# EAGLE board RoomMonitor (EAGLE 8.4.2)
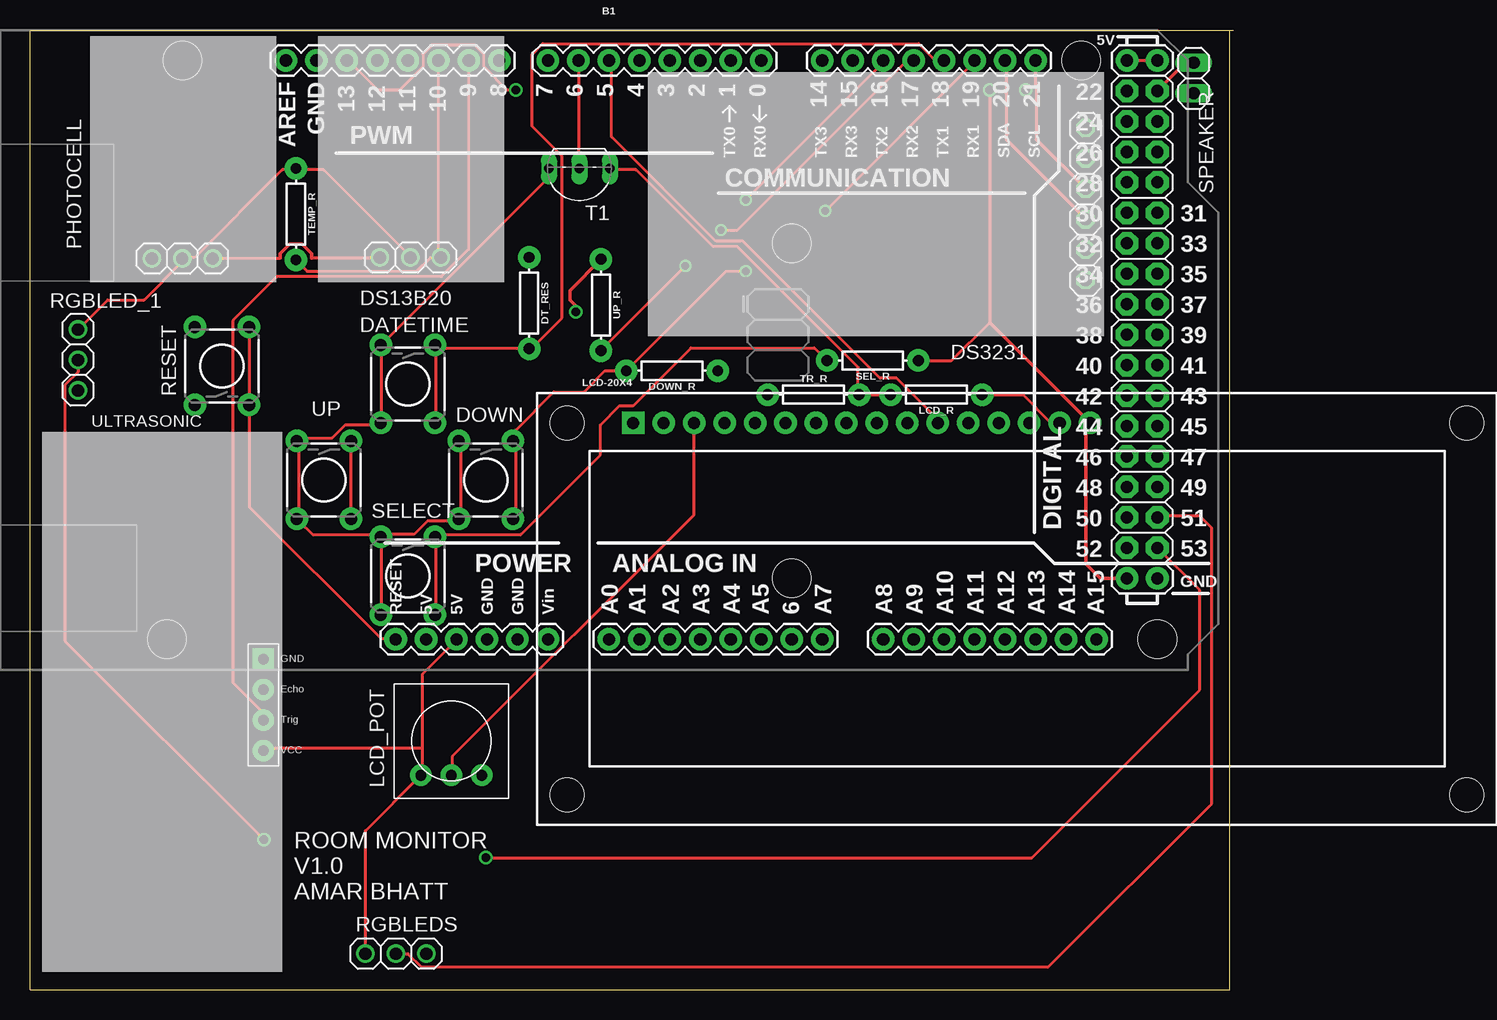
[diagram p0: board, top side]
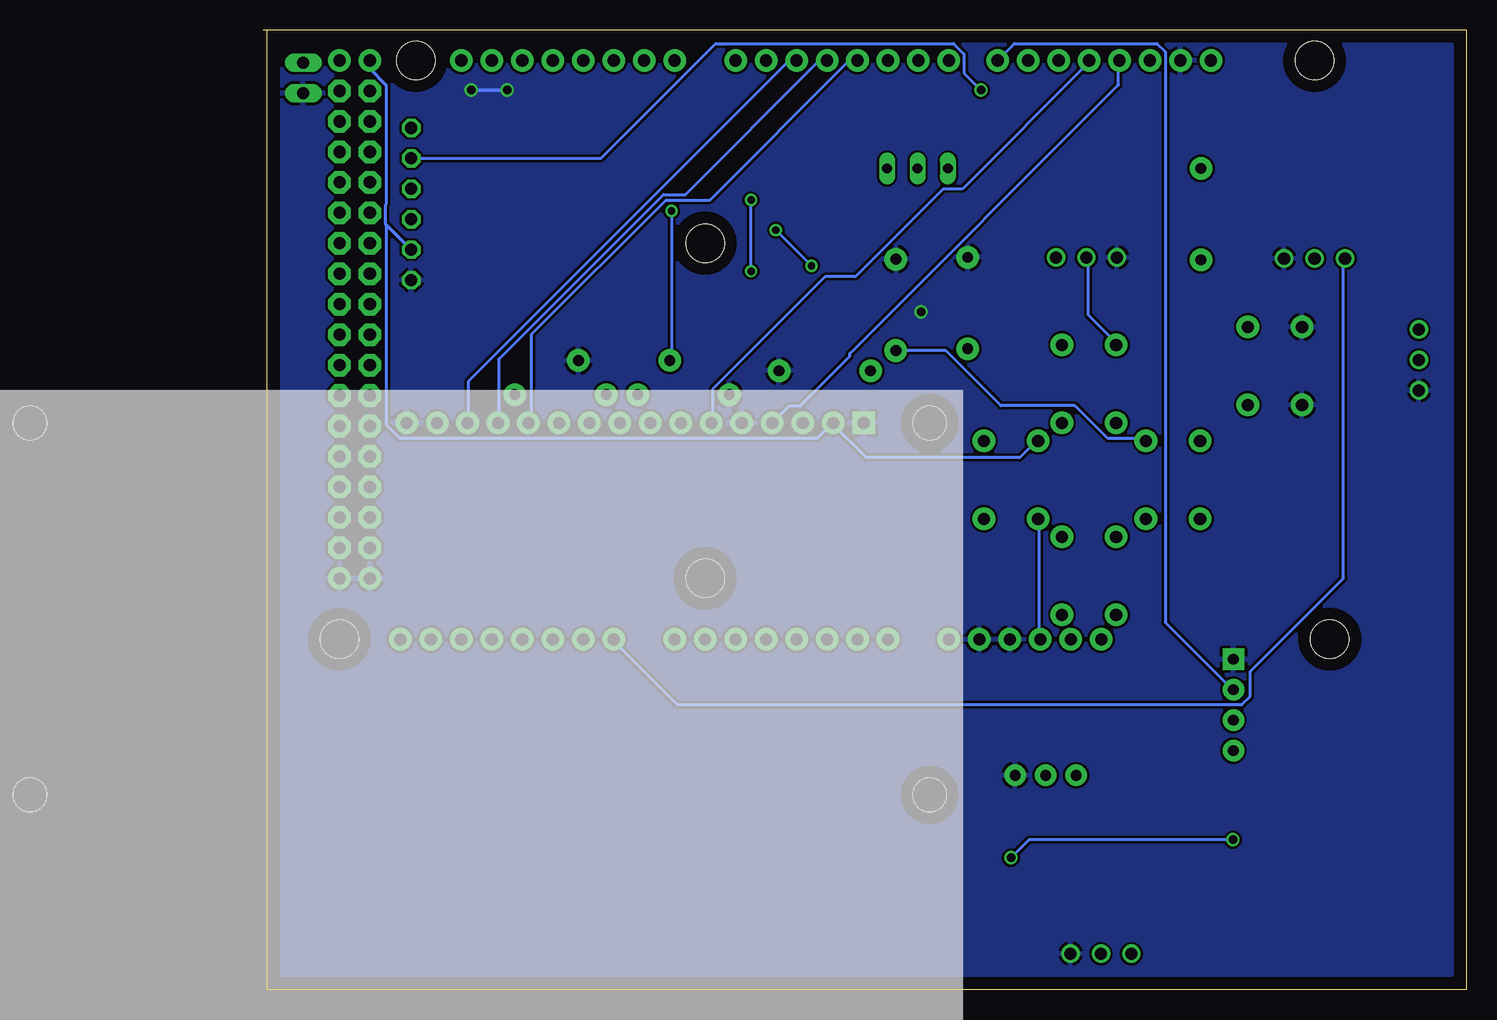
[diagram p1: board, bottom side, seen from below]

Size 100.33 x 80.01 mm. Coordinates in mm from the lower left corner, seen from the top.
Outline: 100,80 100,0 0,0 0,80.01 100.33,80.01
Copper layers (1*16): Top 0.035mm / dielectric 1.5mm / Bottom 0.035mm
Design rules "default": minimum track width 10mil, minimum drill 24mil, track to track 8mil, track to pad 8mil, pad to pad 8mil, via to via 8mil, smd to smd 8mil, copper to edge 40mil, drill to drill 8mil, minimum pad ring 10mil, minimum via ring 8mil, stop-mask expansion 4mil, vias tented up to drill 0mil, thermal gap 10mil

## Footprints (pad centres in the part's own frame; a part is rotated, then mirrored left to right if it is on the bottom)
ARDUINO_MEGA = drill 1.016 pad 1.88: 0 13.97,24.13; 1 11.43,24.13; 2 8.89,24.13; 3 6.35,24.13; 3.3V -13.97,-24.13; 4 3.81,24.13; 5 1.27,24.13; 5V@0 -11.43,-24.13; 5V@1 44.45,24.13; 5V@2 46.99,24.13; 6 -1.27,24.13; 7 -3.81,24.13; 8 -7.874,24.13; 9 -10.414,24.13; 10 -12.954,24.13; 11 -15.494,24.13; 12 -18.034,24.13; 13 -20.574,24.13; 14 19.05,24.13; 15 21.59,24.13; 16 24.13,24.13; 17 26.67,24.13; 18 29.21,24.13; 19 31.75,24.13; 20 34.29,24.13; 21 36.83,24.13; A0 1.27,-24.13; A1 3.81,-24.13; A2 6.35,-24.13; A3 8.89,-24.13; A4 11.43,-24.13; A5 13.97,-24.13; A6 16.51,-24.13; A7 19.05,-24.13; A8 24.13,-24.13; A9 26.67,-24.13; A10 29.21,-24.13; A11 31.75,-24.13; A12 34.29,-24.13; A13 36.83,-24.13; A14 39.37,-24.13; A15 41.91,-24.13; AREF -25.654,24.13; GND@0 -8.89,-24.13; GND@1 -6.35,-24.13; GND@2 44.45,-19.05; GND@3 46.99,-19.05; GND@4 -23.114,24.13; RESET -16.51,-24.13; VIN -3.81,-24.13 | drill 1.016 pad 1.88 octagon: 22 44.45,21.59; 23 46.99,21.59; 24 44.45,19.05; 25 46.99,19.05; 26 44.45,16.51; 27 46.99,16.51; 28 44.45,13.97; 29 46.99,13.97; 30 44.45,11.43; 31 46.99,11.43; 32 44.45,8.89; 33 46.99,8.89; 34 44.45,6.35; 35 46.99,6.35; 36 44.45,3.81; 37 46.99,3.81; 38 44.45,1.27; 39 46.99,1.27; 40 44.45,-1.27; 41 46.99,-1.27; 42 44.45,-3.81; 43 46.99,-3.81; 44 44.45,-6.35; 45 46.99,-6.35; 46 44.45,-8.89; 47 46.99,-8.89; 48 44.45,-11.43; 49 46.99,-11.43; 50 44.45,-13.97; 51 46.99,-13.97; 52 44.45,-16.51; 53 46.99,-16.51 | hole 3.2: -34.29,24.13; -35.56,-24.13; 16.51,8.89; 16.51,-19.05; 40.64,24.13; 46.99,-24.13
TACTILE-PTH = drill 1.016 pad 1.88: 1 -3.251,2.261; 2 3.251,2.261; 3 -3.251,-2.261; 4 3.251,-2.261
AXIAL-0.3 = drill 0.9 pad 1.88: P$1 -3.81,0; P$2 3.81,0
1X03 = drill 1.016: 1 -2.54,0; 2 0,0; 3 2.54,0
1X06 = drill 1.016 octagon: 1 -6.35,0; 2 -3.81,0; 3 -1.27,0; 4 1.27,0; 5 3.81,0; 6 6.35,0
LCD-16X2 = drill 1.016 pad 1.88 square: 1 -32,15.5 | drill 1.016 pad 1.88: 2 -29.46,15.5; 3 -26.92,15.5; 4 -24.38,15.5; 5 -21.84,15.5; 6 -19.3,15.5; 7 -16.76,15.5; 8 -14.22,15.5; 9 -11.68,15.5; 10 -9.14,15.5; 11 -6.6,15.5; 12 -4.06,15.5; 13 -1.52,15.5; 14 1.02,15.5; 15 3.56,15.5; 16 6.1,15.5 | hole 2.8: -37.5,15.5; -37.5,-15.5; 37.5,15.5; 37.5,-15.5
TRIM-3386 = drill 0.9 pad 1.778: 1 -2.54,-2.857; 2 0,-2.857; 3 2.54,-2.857
1X02 = drill 1.016 long: 1 -1.27,0; 2 1.27,0
TO92-EBC-OVAL = drill 0.813 long: B 0,-1.27; C 2.54,-1.27; E -2.54,-1.27
HC-SR04_FOOTPRINT = drill 0.9 pad 1.778: ECHO 0,1.27; TRIG 0,-1.27; VCC 0,-3.81 | drill 0.9 pad 1.778 square: GND 0,3.81

## Placement (x,y rotation side)
B1  ARDUINO_MEGA_R3FULL  [ARDUINO_MEGA]  46.99,53.34 0 top
DATETIME  [TACTILE-PTH]  31.5,50.5 270 top
DOWN  [TACTILE-PTH]  38,42.5 270 top
DOWN_R  10K  [AXIAL-0.3]  53.52,51.6 180 top
DS13B20  [1X03]  31.71,61.04 0 top
DS3231  [1X06]  88,65.5 90 top
DT_RES  10K  [AXIAL-0.3]  41.61,57.25 270 top
LCD-20X4  LCD-16X2SILK  [LCD-16X2]  82.28,31.75 0 top
LCD_POT  [TRIM-3386]  35.12,20.73 0 top
LCD_R  220  [AXIAL-0.3]  75.55,49.61 180 top
PHOTOCELL  [1X03]  12.7,60.96 180 top
RESET  [TACTILE-PTH]  16,52 90 top
RGBLED_1  [1X03]  4,52.5 270 top
RGBLEDS  [1X03]  30.5,3 0 top
SEL_R  10K  [AXIAL-0.3]  70.25,52.45 180 top
SELECT  [TACTILE-PTH]  31.5,34.5 270 top
SPEAKER  [1X02]  97,76 90 top
T1  2N2222  [TO92-EBC-OVAL]  45.8,67.19 180 top
TEMP_R  1M  [AXIAL-0.3]  22.17,64.65 270 top
TR_R  1M  [AXIAL-0.3]  65.3,49.61 0 top
ULTRASONIC  HC-SR04  [HC-SR04_FOOTPRINT]  19.46,23.74 0 top
UP  [TACTILE-PTH]  24.5,42.5 270 top
UP_R  10K  [AXIAL-0.3]  47.6,57.09 270 top

## Library data of the parts
B1 = SparkFun-Boards
DATETIME DOWN RESET SELECT = SparkFun-Retired
DOWN_R DT_RES LCD_R SEL_R TEMP_R TR_R UP_R = SparkFun-Resistors; PROD_ID: RES-09329
DS13B20 DS3231 LCD_POT PHOTOCELL RGBLED_1 RGBLEDS T1 = adafruit
LCD-20X4 = SparkFun-Displays; SF_ID: LCD-00255
SPEAKER = pinhead
ULTRASONIC = hc-sr04
UP = SparkFun-Retired; SPICEPREFIX: E

## Nets
5V: B1.5V@0 B1.5V@1 B1.5V@2 DATETIME.3 DATETIME.4 DOWN.3 DOWN.4 DS13B20.2 DS3231.2 LCD-20X4.2 LCD_POT.1 PHOTOCELL.2 RGBLED_1.1 RGBLEDS.1 SELECT.3 SELECT.4 T1.C TEMP_R.P$1 ULTRASONIC.VCC UP.3 UP.4
CLK_DS: B1.13 DS3231.5
CLK_SCL: B1.21 DS3231.4
CLK_SDA: B1.20 DS3231.3
DOWN_BUT: B1.16 DOWN.1 DOWN.2 DOWN_R.P$2
DS13B20: B1.10 DS13B20.3 TEMP_R.P$2
DT_BUT: B1.18 DATETIME.1 DATETIME.2 DT_RES.P$2
GND: B1.GND@0 B1.GND@1 B1.GND@2 B1.GND@3 B1.GND@4 DOWN_R.P$1 DS13B20.1 DS3231.1 DT_RES.P$1 LCD-20X4.1 LCD-20X4.5 LCD-20X4.16 LCD_POT.3 PHOTOCELL.1 RESET.1 RESET.2 RGBLED_1.3 RGBLEDS.3 SEL_R.P$1 SPEAKER.1 TR_R.P$1 ULTRASONIC.GND UP_R.P$1
LCD_E: B1.11 LCD-20X4.6
N$1: B1.53 RGBLED_1.2
N$2: B1.5 LCD-20X4.11
N$3: B1.4 LCD-20X4.12
N$4: B1.51 RGBLEDS.2
N$6: B1.3 LCD-20X4.13
N$7: B1.2 LCD-20X4.14
N$9: LCD_R.P$2 T1.E TR_R.P$2
N$11: LCD-20X4.15 LCD_R.P$1
N$22: B1.12 LCD-20X4.4
PHOTOCELL: B1.A8 PHOTOCELL.3
POT: LCD-20X4.3 LCD_POT.2
RESET: B1.RESET RESET.3 RESET.4
SEL_BUT: B1.19 SEL_R.P$2 SELECT.1 SELECT.2
SPEAKER: B1.23 SPEAKER.2
TR_SW: B1.6 T1.B
UP_BUT: B1.17 UP.1 UP.2 UP_R.P$2
US_ECHO: B1.8 ULTRASONIC.ECHO
US_TRIG: B1.9 ULTRASONIC.TRIG

## Tracks (layer width: path | path; a pad name or v marks a point on that pad's centre or on a via)
5V
  Top 0.254: SELECT.4 29.26,31.32 29.26,37.72 SELECT.3 | 29.26,53.72 43.2,67.67 43.2,68.35 T1.C | 29.26,53.72 29.26,47.32 DATETIME.4 29.03,47.09 26.29,47.09 25.15,45.95 22.4,45.95 UP.3 22.4,45.72 22.4,39.32 UP.4 22.4,39.09 23.55,37.95 29.03,37.95 SELECT.3 | 29.26,53.72 DATETIME.3 | DS13B20.2 31.55,61.27 24.46,68.35 22.17,68.35 TEMP_R.P$1 21.95,68.35 21.03,68.35 13.72,61.04 12.8,61.04 PHOTOCELL.2 12.7,60.7 9.5,57.5 6.46,57.5 RGBLED_1.1 | 32.69,20.12 32.69,26.29 35.43,29.03 B1.5V@0 | 32.69,20.12 32.69,18.06 LCD_POT.1 27.96,13.25 RGBLEDS.1 | 32.69,20.12 19.66,20.12 ULTRASONIC.VCC | B1.5V@2 93.95,77.5 91.44,77.5 B1.5V@1 | DOWN.3 35.89,45.72 35.89,39.32 DOWN.4 35.66,39.09 33.15,39.09 32,37.95 29.26,37.95 SELECT.3
  Bottom 0.254: DS13B20.2 31.55,61.04 31.55,56.24 29.26,53.95 DATETIME.3 | DOWN.3 35.89,45.72 37.26,44.35 50.06,44.35 52.81,47.09 LCD-20X4.2 53.03,47.09 54.18,45.95 88.92,45.95 90.07,47.09 90.07,63.76 90.14,63.84 90.14,65.42 90.07,65.5 90.07,75.39 90.14,75.47 | B1.5V@0 35.66,29.26 35.66,39.09 DOWN.4
  Bottom 0.305: B1.5V@1 91.44,76.76 90.14,75.47 | DS3231.2 90.14,63.84
CLK_DS  (via drill 0.7)
  Top 0.254: B1.13 26.52,77.5 29.01,75 30.82,75 32.77,76.94 32.77,78 33.51,78.74 37.1,78.74 37.85,78 37.85,76.94 39.79,75 v40.5,75
  Bottom 0.254: DS3231.5 72.19,69.31 62.63,78.87 42.78,78.87 41.91,78 41.91,76.41 v40.5,75
CLK_SCL
  Top 0.305: B1.21 83.82,75.47 83.91,75.38 83.91,70.86 DS3231.4
  Bottom 0.254: 83.9,77.27 B1.21
CLK_SDA
  Top 0.254: 81.38,77.27 B1.20
  Top 0.305: DS3231.3 81.38,70.85 81.38,77.27
DOWN_BUT  (via drill 0.61)
  Top 0.254: DOWN.2 40.46,39.32 40.46,45.72 DOWN.1 40.46,45.95 40.46,46.63 43.66,49.84 46.18,49.84 47.94,51.6 DOWN_R.P$2 58,59.89 v59.66,59.89 | v59.66,65.84 71.09,77.27 B1.16
  Bottom 0.254: v59.66,59.89 v59.66,65.84
DS13B20
  Top 0.254: TEMP_R.P$2 22.17,60.81 23.09,59.89 32.23,59.89 33.38,61.04 34.06,61.04 DS13B20.3 34.06,61.27 34.06,77.27 B1.10
DT_BUT
  Top 0.254: 33.83,53.49 33.83,53.72 DATETIME.1 33.83,53.49 | 33.83,53.49 33.83,47.32 DATETIME.2 | 33.83,53.49 41.6,53.49 DT_RES.P$2 41.83,53.49 44.35,56.01 44.35,69.49 41.83,72.01 41.83,77.95 42.75,78.87 74.07,78.87 75.44,77.5 76.12,77.5 B1.18
GND  (via drill 0.7)
  Top 0.254: SEL_R.P$1 76.82,52.45 80,55.63
  Top 0.305: PHOTOCELL.1 20.88,60.99 20.88,61.38 21.63,62.13 22.71,62.13 23.46,61.38 23.46,61.01 DS13B20.1 | B1.GND@2 89.21,34.29 88,35.5 88,46.87 LCD-20X4.16 80,55.63 v80,75 | UP_R.P$1 45,58.3 45,57.5 45.5,57 v45.5,56.5
  Bottom 0.254: 91.67,34.29 B1.GND@2
  Bottom 0.305: v80,75 v83,75
  pour Bottom: 1.27,78.74 99.06,78.74 99.06,1.27 1.27,1.27
LCD_E
  Bottom 0.254: LCD-20X4.6 62.87,47.32 62.87,50.06 53.49,59.44 50.98,59.44 43.66,66.75 42.06,66.75 31.55,77.27 B1.11
N$1  (via drill 0.7)
  Top 0.254: RGBLED_1.2 4,51.51 2.91,50.41 2.91,29.09 v19.5,12.5 | v38,11 83.5,11 97.5,25 97.5,33.31 B1.53
  Bottom 0.254: v19.5,12.5 36.5,12.5 v38,11
N$2
  Top 0.254: B1.5 48.46,77.27 48.46,71.09 57.15,62.41 59.44,62.41 70.87,50.98 72.24,50.98 75.89,47.32 LCD-20X4.11
N$3
  Bottom 0.254: B1.4 50.98,77.27 51.66,77.27 63.09,65.84 66.75,65.84 77.95,54.63 77.95,47.55 78.18,47.32 LCD-20X4.12
N$4
  Top 0.254: RGBLEDS.2 31.5,3 32.59,1.91 84.91,1.91 98.5,15.5 98.5,38.5 97.5,39.5 94.11,39.5 B1.51
N$6
  Bottom 0.254: B1.3 53.49,77.27 54.18,77.27 65.15,66.29 66.98,66.29 80.7,52.58 80.7,47.32 LCD-20X4.13
N$7
  Bottom 0.254: B1.2 56.01,77.27 56.69,77.27 83.21,50.75 83.21,47.32 LCD-20X4.14
N$9
  Top 0.254: T1.E 48.46,68.35 50.52,68.35 56.92,61.95 58.98,61.95 69.04,51.89 69.04,49.84 TR_R.P$2 69.27,49.61 71.55,49.61 LCD_R.P$2
N$11
  Top 0.254: LCD-20X4.15 85.72,47.32 85.04,47.32 82.75,49.61 79.55,49.61 LCD_R.P$1
N$22
  Bottom 0.254: B1.12 29.03,77.27 29.03,75.44 51.44,53.03 51.44,52.81 55.55,48.69 56.46,48.69 57.84,47.32 LCD-20X4.4
PHOTOCELL
  Bottom 0.254: PHOTOCELL.3 10.29,60.81 10.29,34.29 18.06,26.52 18.06,24.46 18.75,23.77 65.84,23.77 71.09,29.03 B1.A8
POT
  Top 0.254: LCD_POT.2 35.2,18.06 35.2,19.43 55.32,39.55 55.32,47.09 LCD-20X4.3
RESET
  Top 0.254: RESET.4 18.29,55.09 18.29,48.92 RESET.3 18.29,48.69 18.29,40.23 29.26,29.26 30.4,29.26 B1.RESET
SEL_BUT  (via drill 0.61)
  Top 0.254: SELECT.2 33.83,31.32 33.83,37.72 SELECT.1 33.83,37.95 40.92,37.95 47.55,44.58 47.55,47.09 49.15,48.69 50.29,48.69 55.1,53.5 65.39,53.5 SEL_R.P$2 | v66.29,64.92 78.64,77.27 B1.19
  Bottom 0.254: SEL_R.P$2 66.29,52.6 v66.29,64.92
SPEAKER
  Top 0.305: B1.23 96.32,77.27 SPEAKER.2
TR_SW
  Top 0.254: B1.6 45.72,68.58 T1.B
UP_BUT  (via drill 0.61)
  Top 0.254: UP.2 26.75,39.32 26.75,45.72 UP.1 | v57.61,63.32 58.98,63.32 72.92,77.27 73.61,77.27 B1.17 | v54.63,60.35 47.78,53.49 UP_R.P$2
  Bottom 0.254: UP_R.P$2 47.55,53.26 43.43,53.26 38.86,48.69 32.69,48.69 29.95,45.95 26.98,45.95 UP.1 | v54.63,60.35 v57.61,63.32
US_ECHO
  Bottom 0.254: B1.8 37.72,78.87 25.83,78.87 25.15,78.18 25.15,30.63 19.66,25.15 ULTRASONIC.ECHO
US_TRIG
  Top 0.254: B1.9 36.58,61.72 34.29,59.44 20.57,59.44 16.92,55.78 16.92,25.6 19.43,23.09 19.43,22.63 ULTRASONIC.TRIG

## Text on the board
tPlace: ROOM MONITOR / V1.0 / AMAR BHATT